# EAGLE board rj12_adapter (EAGLE 8.5.0)
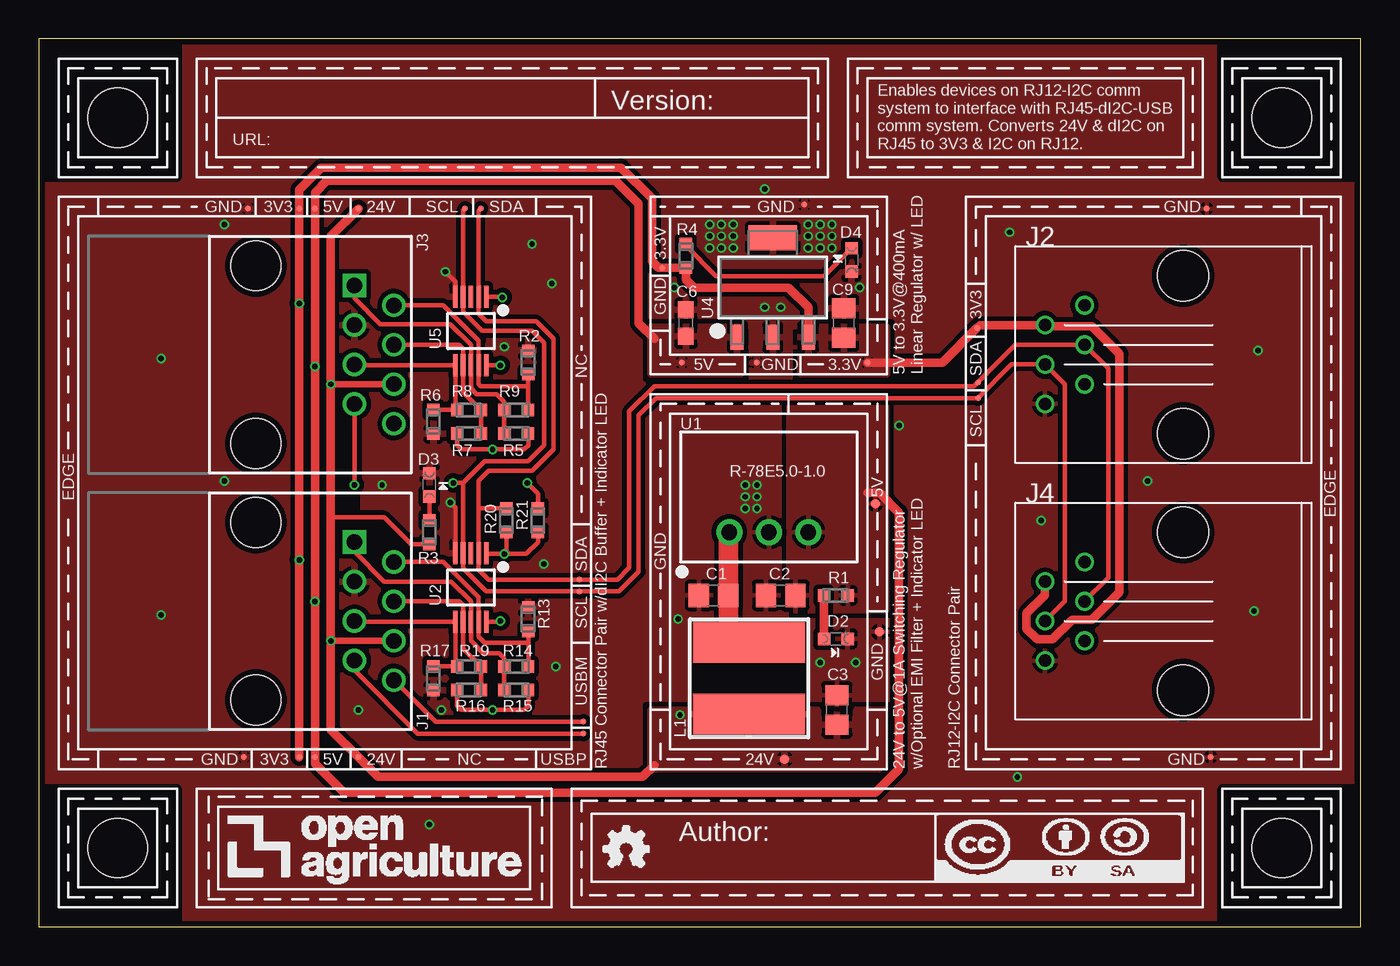
[diagram p0: board, top side]
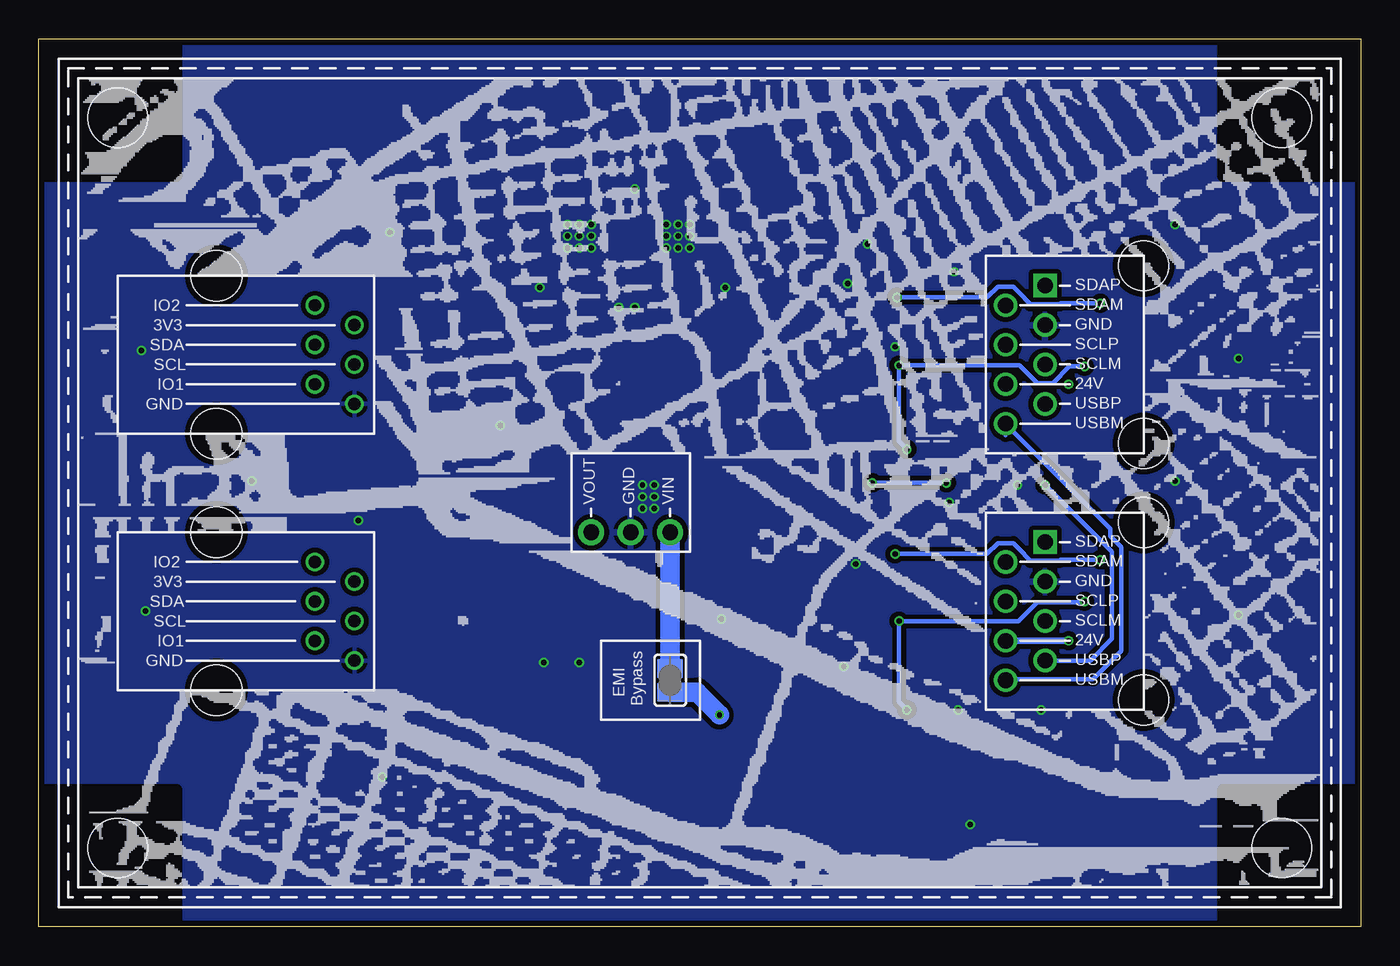
[diagram p1: board, bottom side, seen from below]

Size 85.09 x 57.15 mm. Coordinates in mm from the lower left corner, seen from the top.
Outline: 0,0 85.09,0 85.09,57.15 0,57.15 0,0
Copper layers (1*16): Top 0.035559375mm / dielectric 1.6mm / Bottom 0.035559375mm
Design rules "oshpark-2layer-mask": minimum track width 6mil, minimum drill 10mil, track to track 6mil, track to pad 6mil, pad to pad 6mil, via to via 6mil, smd to smd 6mil, copper to edge 15mil, drill to drill 6mil, minimum pad ring 5mil, minimum via ring 5mil, stop-mask expansion 2.5mil, vias tented up to drill 20mil, thermal gap 10mil
tRestrict: 3 lines

## Footprints (pad centres in the part's own frame; a part is rotated, then mirrored left to right if it is on the bottom)
C0805 = smd 1.3 x 1.5: 1 -0.95,0; 2 0.95,0
C0603 = smd 1.1 x 1: 1 -0.85,0; 2 0.85,0
CHIPLED_0603 = smd 0.8 x 0.8: A 0,-0.75; C 0,0.75
RJ45-DI2C-USB-54602-908LF = drill 1: 24V(6) 1.905,8.89; DSCLM(5) 0.635,6.35; DSCLP(4) -0.635,8.89; DSDAM(2) -3.175,8.89; GND(3) -1.905,6.35; USBM(8) 4.445,8.89; USBP(7) 3.175,6.35 | drill 1 square: DSDAP(1) -4.445,6.35 | hole 3.2: -5.715,0; 5.715,0
RJ12-I2C-A-2004-1-4-LP-N-R = drill 0.8: 1 -8.89,-3.175; 2 -6.35,-1.905; 3 -8.89,-0.635; 4 -6.35,0.635; 5 -8.89,1.905; 6 -6.35,3.175 | hole 3.25: 0,-5.08; 0,5.08
29333C = smd 2.6 x 7.2: 1 -2.3,0; 2 2.3,0
RC0603N = smd 0.756 x 0.8: 1 -0.778,0; 2 0.778,0
SJ1 = smd 1.168 x 1.6: 1 -0.762,0; 2 0.762,0
TP04R = smd 0.4 x 0.4: 1 0,0
TP06R = smd 0.6 x 0.6: TP 0,0
R-78E5.0-1.0 = drill 1 pad 1.676: 1 -2.54,0; 2 0,0; 3 2.54,0
SOP50P490X110-10N = smd 1.4 x 0.3: 1 -2.2,1; 2 -2.2,0.5; 3 -2.2,0; 4 -2.2,-0.5; 5 -2.2,-1; 6 2.2,-1; 7 2.2,-0.5; 8 2.2,0; 9 2.2,0.5; 10 2.2,1
MP04A = smd 1.6 x 0.838: 1 -3.2,2.3; 2 -3.2,0; 3 -3.2,-2.3 | smd 1.6 x 3.099: 4 3.2,0
CORNER = hole 3.81: 0,0

## Placement (x,y rotation side)
C1  10uF  [C0805]  43.43,21.34 180 top
C2  10uF  [C0805]  47.75,21.34 180 top
C3  10uF  [C0805]  51.37,13.97 90 top
C6  0.1uF  [C0603]  41.66,38.86 90 top
C9  10uF  [C0805]  51.82,38.86 90 top
D2  APT1608  [CHIPLED_0603]  51.31,18.54 270 top
D3  APT1608  [CHIPLED_0603]  25.15,28.45 0 top
D4  APT1608  [CHIPLED_0603]  52.32,42.93 180 top
J1  54602-908LF  [RJ45-DI2C-USB-54602-908LF]  13.97,20.32 270 top
J2  A-2004-1-4-LP-N-R  [RJ12-I2C-A-2004-1-4-LP-N-R]  73.66,36.83 0 top
J3  54602-908LF  [RJ45-DI2C-USB-54602-908LF]  13.97,36.83 270 top
J4  A-2004-1-4-LP-N-R  [RJ12-I2C-A-2004-1-4-LP-N-R]  73.66,20.32 0 top
L1  33uH  [29333C]  45.72,16 90 top
R1  100  [RC0603N]  51.31,21.34 0 top
R2  600  [RC0603N]  31.5,36.32 90 top
R3  1K  [RC0603N]  25.15,25.4 270 top
R4  100  [RC0603N]  41.66,43.18 270 top
R5  600  [RC0603N]  30.73,31.75 180 top
R6  600  [RC0603N]  25.4,32.51 90 top
R7  600  [RC0603N]  27.69,31.75 180 top
R8  120  [RC0603N]  27.69,33.27 0 top
R9  120  [RC0603N]  30.73,33.27 0 top
R13  600  [RC0603N]  31.5,19.81 90 top
R14  120  [RC0603N]  30.73,16.76 0 top
R15  600  [RC0603N]  30.73,15.24 180 top
R16  600  [RC0603N]  27.69,15.24 180 top
R17  600  [RC0603N]  25.4,16 90 top
R19  120  [RC0603N]  27.69,16.76 0 top
R20  10K  [RC0603N]  30.1,26.16 270 top
R21  10K  [RC0603N]  32.13,26.16 270 top
SJ1  [SJ1]  44.45,15.88 90 bottom
TP1  TPTP04R  [TP04R]  40.13,42.42 0 top
TP2  TPTP04R  [TP04R]  41.4,36.32 0 top
TP3  TPTP06R  [TP06R]  48.01,10.79 0 top
TP4  TPTP04R  [TP04R]  49.28,46.48 0 top
TP5  TPTP04R  [TP04R]  16.76,10.92 0 top
TP6  TPTP04R  [TP04R]  53.34,36.32 0 top
TP7  TPTP04R  [TP04R]  60.39,38.54 0 top
TP8  TPTP04R  [TP04R]  34.8,22.35 0 top
TP9  TPTP04R  [TP04R]  34.8,21.59 0 top
TP10  TPTP04R  [TP04R]  46.23,36.32 0 top
TP11  TPTP04R  [TP04R]  75.18,46.23 0 top
TP15  TPTP04R  [TP04R]  60.45,34.04 0 top
TP16  TPTP04R  [TP04R]  17.78,10.92 0 top
TP17  TPTP04R  [TP04R]  13.21,10.92 0 top
TP18  TPTP04R  [TP04R]  35.05,12.45 0 top
TP19  TPTP04R  [TP04R]  20.57,10.92 0 top
TP20  TPTP04R  [TP04R]  35.05,13.21 0 top
TP21  TPTP04R  [TP04R]  16.76,46.23 0 top
TP22  TPTP04R  [TP04R]  17.78,46.23 0 top
TP23  TPTP04R  [TP04R]  20.57,46.23 0 top
TP24  TPTP04R  [TP04R]  13.46,46.23 0 top
TP25  TPTP04R  [TP04R]  27.43,46.23 0 top
TP26  TPTP04R  [TP04R]  28.45,46.23 0 top
TP27  TPTP06R  [TP06R]  53.85,27.24 0 top
TP28  TPTP06R  [TP06R]  54.1,18.99 0 top
TP29  TPTP04R  [TP04R]  75.44,10.92 0 top
TP30  TPTP04R  [TP04R]  60.45,35.05 0 top
U1  R-78E5.0-1.0  [R-78E5.0-1.0]  46.99,25.4 0 top
U2  PCA9615  [SOP50P490X110-10N]  27.81,21.84 270 top
U4  LM2937-3.3V  [MP04A]  47.24,41.15 90 top
U5  PCA9615  [SOP50P490X110-10N]  27.81,38.35 270 top
U$1  [CORNER]  5.08,5.08 0 top
U$2  [CORNER]  5.08,52.07 270 top
U$3  [CORNER]  80.01,52.07 180 top
U$4  [CORNER]  80.01,5.08 90 top
U$5  [LOGO]  10.16,1.27 0 top
U$6  AUTHOR  [AUTHOR]  34.29,1.27 0 top
U$7  TITLE  [TITLE]  10.16,48.26 0 top
U$9  [CAMBRIDGE-MAP-RJ12-ADAPTER-V-1-1]  1.27,1.27 0 top

## Library data of the parts
C1-C3 C9 = openag-capacitors; MANUFACTURER: Taiyo Yuden; MPN: GMK212BBJ106KG-T; VENDOR: Digikey; VLINK: https://www.digikey.com/product-detail/en/taiyo-yuden/GMK212BBJ106KG-T/587-4893-1-ND/6563736; VPN: 587-4893-1-ND
C6 = openag-capacitors; MANUFACTURER: Kemet; MPN: C0603C104K5RACTU; VENDOR: Digikey; VLINK: https://www.digikey.com/product-detail/en/kemet/C0603C104K5RACTU/399-5089-1-ND/1465623; VPN: 399-5089-1-ND
D2-D4 = openag-diodes; MANUFACTURER: Kingbright; MPN: APT1608CGCK; VENDOR: Digikey; VLINK: https://www.digikey.com/product-detail/en/kingbright/APT1608CGCK/754-1116-1-ND/1747833#; VPN: 754-1116-1-ND
J1 J3 = openag-connectors; MANUFACTURER: Amphenol FCI; MPN: 54602-908LF; VENDOR: Digikey; VLINK: https://www.digikey.com/product-detail/en/amphenol-fci/54602-908LF/609-1046-ND/1001360; VPN: 609-1046-ND
J2 J4 = openag-connectors; MANUFACTURER: Assmann WSW Components; MPN: A-2004-1-4-LP-N-R; VENDOR: Digikey; VLINK: https://www.digikey.com/product-detail/en/assmann-wsw-components/A-2004-1-4-LP-N-R/AE10383-ND/2183634; VPN: AE10383-ND
L1 = openag-inductors; MANUFACTURER: Murata Power Solutions Inc.; MPN: 29333C; VENDOR: Digikey; VLINK: https://www.digikey.com/product-detail/en/murata-power-solutions-inc/29333C/811-1138-1-ND/1924860; VPN: 811-1138-1-ND
R1 R4 = openag-resistors; MANUFACTURER: Yageo; MPN: RC0603JR-07100RL; VENDOR: Digikey; VLINK: https://www.digikey.com/product-detail/en/yageo/RC0603JR-07100RL/311-100GRCT-ND/729644; VPN: 311-100GRCT-ND
R2 R5-R7 R13 R15-R17 = openag-resistors; MANUFACTURER: Yageo; MPN: RC0603FR-07604RL; VENDOR: Digikey; VLINK: https://www.digikey.com/product-detail/en/yageo/RC0603FR-07604RL/311-604HRCT-ND/730276; VPN: 311-604HRCT-ND
R3 = openag-resistors; MANUFACTURER: Panasonic; MPN: P20283CT-ND; VENDOR: Digikey; VLINK: https://www.digikey.com/product-detail/en/panasonic-electronic-components/ERJ-PB3D1001V/P20283CT-ND/6214538; VPN: P20283CT-ND
R8 R9 R14 R19 = openag-resistors; MANUFACTURER: Yageo; MPN: RC0603FR-07120RL; VENDOR: Digikey; VLINK: https://www.digikey.com/product-detail/en/yageo/RC0603FR-07120RL/311-120HRCT-ND/729867; VPN: 311-120HRCT-ND
R20 R21 = openag-resistors; MANUFACTURER: Panasonic; MPN: ERJ-3EKF1002V; VENDOR: Digikey; VLINK: https://www.digikey.com/product-detail/en/panasonic-electronic-components/ERJ-3EKF1002V/P10.0KHCT-ND/198102; VPN: P10.0KHCT-ND
SJ1 = openag-connectors; MPN: N/A
TP1-TP11 TP15-TP30 = openag-testpads; MPN: N/A
U1 = openag-regulators; MANUFACTURER: Recom Power; MPN: R-78E5.0-1.0; VENDOR: Digikey; VLINK: https://www.digikey.com/product-detail/en/recom-power/R-78E5.0-1.0/945-2201-ND/4930585; VPN: 945-2201-ND
U2 U5 = openag-buffers; MANUFACTURER: NXP USA Inc.; MPN: PCA9615DPJ; VENDOR: Digikey; VLINK: https://www.digikey.com/product-detail/en/nxp-usa-inc/PCA9615DPJ/568-11484-1-ND/4864508; VPN: 568-11484-1-ND
U4 = openag-regulators; MANUFACTURER: Texas Instruments; MPN: LM2937IMP-3.3/NOPB; VENDOR: Digikey; VLINK: https://www.digikey.com/product-detail/en/texas-instruments/LM2937IMP-3.3-NOPB/LM2937IMP-3.3-NOPBCT-ND/270742#; VPN: LM2937IMP-3.3/NOPBCT-ND
U$1-U$5 U$9 = openag-frames
U$6 = openag-frames; AUTHOR: Jake Rye; MPN: N/A
U$7 = openag-frames; MPN: N/A; TITLE: RJ12 to RJ45 Adapter; URL: https://github.com/openaginitiative/openag_eagle/proj/rj12-adapter; VER: 1.1

## Nets
24V_EMI: C1.1 L1.2 SJ1.2 U1.1
+3V3: C9.1 J2.5 J4.5 R4.2 R20.2 R21.2 TP1.1 TP5.1 TP6.1 TP7.1 TP21.1 U2.1 U4.3 U5.1
+5V: C2.1 C6.1 R1.2 R5.1 R7.2 R15.1 R16.2 TP2.1 TP16.1 TP22.1 TP27.TP U1.3 U2.10 U4.1 U5.10
+24V: C3.1 J1.24V(6) J3.24V(6) L1.1 R3.2 SJ1.1 TP3.TP TP19.1 TP23.1
DSCLM_1: J1.DSCLM(5) R17.2 R19.1 U2.6
DSCLM_2: J3.DSCLM(5) R6.2 R8.1 U5.6
DSCLP_1: J1.DSCLP(4) R16.1 R19.2 U2.7
DSCLP_2: J3.DSCLP(4) R7.1 R8.2 U5.7
DSDAM_1: J1.DSDAM(2) R13.1 R14.2 U2.9
DSDAM_2: J3.DSDAM(2) R2.1 R9.2 U5.9
DSDAP_1: J1.DSDAP(1) R14.1 R15.2 U2.8
DSDAP_3: J3.DSDAP(1) R5.2 R9.1 U5.8
GND: C1.2 C2.2 C3.2 C6.2 C9.2 D2.C D3.C D4.C J1.GND(3) J2.1 J3.GND(3) J4.1 R2.2 R6.1 R13.2 R17.1 TP4.1 TP10.1 TP11.1 TP17.1 TP24.1 TP28.TP TP29.1 U1.2 U2.5 U4.2 U4.4 U5.5
N$5: D4.A R4.1
N$6: D2.A R1.1
N$7: D3.A R3.1
SCL: J2.3 J4.3 R21.1 TP9.1 TP15.1 TP25.1 U2.4 U5.4
SDA: J2.4 J4.4 R20.1 TP8.1 TP26.1 TP30.1 U2.2 U5.2
USBM: J1.USBM(8) J3.USBM(8) TP20.1
USBP: J1.USBP(7) J3.USBP(7) TP18.1

## Tracks (layer width: path | path; a pad name or v marks a point on that pad's centre or on a via)
24V_EMI
  Top 1.27: U1.1 44.38,25.33 C1.1 44.38,19.64 arc90 L1.2
  Bottom 1.27: U1.1 SJ1.2
+3V3  (via drill 0.35)
  Top 0.305: U2.1 28.85,24 v29.97,24 | v29.97,24 30.1,24.13 R20.2 | U5.1 29.8,40.55 v29.84,40.51 | v29.97,24 31.37,24 32.13,24.77 R21.2
  Top 0.559: TP5.1 v16.76,23.62 v16.76,40.13 TP21.1 16.76,47.45 18.18,48.87 37.49,48.87 39.47,46.89 39.47,42.82 39.88,42.42 TP1.1 41.64,42.42 R4.2 41.66,41.66 42.16,41.15 48.26,41.15 49.54,39.86 U4.3 | TP6.1 58.17,36.32 TP7.1 60.58,38.73 J2.5 64.86,38.65 67.8,38.65 69.57,36.88 69.57,21.54 67.8,19.77 66.53,19.77 65.26,18.5 64.28,18.5 63.59,19.19 63.59,20.18 64.77,21.36 J4.5
  Bottom 0.305: v29.97,24 24.06,24 23.36,24.7 22.36,24.7 21.65,24 21.65,23.95 21.26,23.56 19.38,23.56 19.32,23.62 v16.76,23.62 | v16.76,40.13 19.32,40.13 19.38,40.07 21.26,40.07 21.65,40.46 21.65,40.51 22.36,41.21 23.36,41.21 24.06,40.51 v29.84,40.51
  pour Top (isolate 0.305): 54.61,35.56 54.61,38.61 49.02,38.61 49.02,35.56
+5V  (via drill 0.35)
  Top 0.305: U5.10 29.71,36.15 v29.72,36.14 | R7.2 26.91,31 27.18,30.73 v29.21,30.73 31.24,30.73 31.51,31 R5.1 | U2.10 29.68,19.64 v29.72,19.68 | R16.2 26.91,14.24 27.18,13.97 v29.21,13.97 31.24,13.97 31.51,14.24 R15.1
  Top 0.559: 39.62,37.85 38.61,38.86 38.61,46.53 37.13,48.01 18.54,48.01 17.78,47.24 TP22.1 v17.78,36.07 v17.78,20.95 TP16.1 | TP16.1 17.78,10.67 | TP16.1 17.78,10.5 19.64,8.64 53.85,8.64 55.37,10.16 55.37,26.67 54.1,27.94 53.34,27.94
  Bottom 0.305: v29.21,30.73 29.72,31.24 v29.72,36.14 21.98,36.14 20.82,34.99 19.82,34.99 18.74,36.07 v17.78,36.07 | v17.78,20.95 17.84,20.89 20.82,20.89 22.03,19.68 v29.72,19.68 29.72,14.48 v29.21,13.97
  pour Top (isolate 0.305): 54.61,34.29 54.61,20.32 48.26,20.32 48.26,34.29
  pour Top (isolate 0.305): 39.37,35.56 45.21,35.56 45.21,38.61 39.37,38.61
+24V  (via drill 0.35)
  Top 0.305: 18.92,18.41 18.8,18.29 | 18.8,26.35 22.23,26.35 23.95,24.62 R3.2
  Top 0.406: J1.24V(6) 18.92,18.41 | J3.24V(6) v18.8,34.92
  Top 0.559: 39.62,10.41 38.86,9.65 21.84,9.65 TP19.1 18.8,12.7 v18.8,18.41 | 18.8,18.29 v18.8,18.41 | v18.8,18.41 18.8,26.35 v18.8,34.92 18.8,44.45 TP23.1
  Bottom 0.406: J1.24V(6) v18.8,18.41
  Bottom 1.27: SJ1.1 42.74,15.11 v41.27,13.65
  pour Top (isolate 0.406): 54.61,13.97 54.61,10.16 39.37,10.16 39.37,13.97
DSCLM_1
  Top 0.305: R17.2 25.42,16.76 R19.1 26.81,16.8 U2.6 20.36,19.64 J1.DSCLM(5)
DSCLM_2
  Top 0.305: U5.6 26.81,36.69 | U5.6 20.32,36.15 J3.DSCLM(5) | U5.6 26.81,33.37 R8.1 25.42,33.27 R6.2
DSCLP_1
  Top 0.305: J1.DSCLP(4) 27.05,20.95 27.31,20.69 U2.7 27.31,17.91 R19.2 R16.1
DSCLP_2
  Top 0.305: J3.DSCLP(4) 27.05,37.47 27.31,37.2 U5.7 27.31,34.41 28.45,33.27 R8.2 R7.1
DSDAM_1
  Top 0.305: U2.9 28.32,19.65 | U2.9 28.31,21.22 26.04,23.5 J1.DSDAM(2) | R14.2 31.51,18.29 | 31.51,18.29 31.51,18.76 R13.1 | U2.9 28.31,18.68 28.7,18.29 31.51,18.29
DSDAM_2
  Top 0.305: J3.DSDAM(2) 26.04,40.01 28.31,37.73 U5.9 28.31,34.93 28.45,34.8 31.5,34.8 | R2.1 31.5,34.8 | 31.5,34.8 31.5,33.29 R9.2
DSDAP_1
  Top 0.305: J1.DSDAP(1) 20.32,24.13 22.23,22.23 26.54,22.23 27.81,20.95 U2.8 27.81,18.41 28.61,17.62 29.62,17.62 29.96,17.29 R14.1 | R14.1 R15.2 | 29.89,16.76 R14.1
DSDAP_3
  Top 0.305: J3.DSDAP(1) 20.32,40.44 21.96,38.8 26.48,38.8 27.81,37.47 U5.8 27.81,34.67 28.19,34.29 29.46,34.29 29.96,33.8 R9.1 R5.2
GND  (via drill 0.35)
  Top 0.305: U5.5 26.81,41.51 v26.16,42.16 | v26.48,27.3 26.81,26.97 U2.5
  other vias: 46.74,47.5 62.99,9.65 25.15,6.6 7.87,20.07 62.48,44.7 64.52,26.16 33.27,16.76 71.37,28.7 55.37,32.26 50.29,17.02 41.15,19.81 44.7,44.45 44.7,43.69 43.94,44.45 43.94,43.69 43.18,43.69 43.18,44.45 44.7,45.21 43.18,45.21 43.94,45.21 49.53,43.69 50.29,43.69 51.05,43.69 49.53,44.45 49.53,45.21 50.29,44.45 50.29,45.21 51.05,45.21 51.05,44.45 46.74,39.88 52.83,41.15 47.75,39.88 11.94,28.7 40.89,41.15 78.23,20.32 78.49,37.08 7.87,36.58 22.1,28.45 11.94,45.21 29.97,37.34 25.91,13.97 46.23,26.92 46.23,27.69 45.47,27.69 45.47,26.92 46.23,28.45 45.47,28.45 31.75,43.94 33.02,41.4 32.51,23.37 20.57,13.97 52.58,17.02
  pour Top (isolate 0.406, rank 3): 39.37,46.99 39.37,35.56 54.61,35.56 54.61,46.99
  pour Top (isolate 0.305, rank 3): 0,0 85.09,0 85.09,57.15 0,57.15
  pour Top (isolate 0.305): 1.27,10.16 35.56,10.16 35.56,46.99 1.27,46.99
  pour Bottom (isolate 0.406): 35.56,10.16 35.56,46.99 1.27,46.99 1.27,10.16
  pour Bottom (isolate 0.305, rank 3): 0,0 85.09,0 85.09,57.15 0,57.15
  pour Top (isolate 0.305): 83.82,46.99 83.82,10.16 59.69,10.16 59.69,46.99
  pour Top (isolate 0.305, rank 2): 54.61,34.29 54.61,10.16 39.37,10.16 39.37,34.29
  pour Bottom (isolate 0.406, rank 2): 39.37,34.29 39.37,10.16 54.61,10.16 54.61,34.29
  pour Bottom (isolate 0.406): 39.37,46.99 54.61,46.99 54.61,35.56 39.37,35.56
N$5
  Top 0.305: D4.A 50.53,41.88 43.6,41.88 41.66,43.83 R4.1
N$6
  Top 0.559: R1.1 50.53,18.57 D2.A
N$7
  Top 0.305: R3.1 D3.A
SCL  (via drill 0.35)
  Top 0.305: 27.31,28.58 U2.4 27.31,23.08 28.8,21.59 TP9.1 37.34,21.59 38.61,22.86 38.61,32.92 39.73,34.04 TP15.1 62.61,36.2 J2.3 66.04,34.92 66.04,20.95 J4.3 | 31.75,30.23 31.5,29.97 28.7,29.97 27.31,28.58 | TP25.1 27.31,46.11 U5.4 27.31,39.59 28.55,38.35 31.75,38.35 32.51,37.59 32.51,30.99 31.75,30.23 | 27.31,28.58 26.68,28.58 v26.67,28.57 | v31.43,28.57 32.13,27.88 R21.1 | 31.75,30.23
  Bottom 0.305: v26.67,28.57 v31.43,28.57
SDA
  Top 0.305: 28.31,26.92 U2.2 28.31,23 28.96,22.35 TP8.1 37.24,22.35 38,23.11 38,33.17 39.62,34.8 60.2,34.8 TP30.1 62.87,37.47 J2.4 68.83,35.94 68.83,22.48 J4.4 | R20.1 28.33,26.94 28.31,26.92 | 28.31,26.92 28.31,28.72 28.96,29.36 31.75,29.36 33.12,30.73 33.12,37.84 32,38.96 28.8,38.96 28.31,39.45 U5.2 28.31,46.09 TP26.1
USBM
  Top 0.305: J1.USBM(8) 25.53,13.21 TP20.1
  Bottom 0.305: 22.86,31.65 J3.USBM(8) 16.1,25.63 16.1,25.15 15.39,24.44 15.39,17.78 17.24,15.94 22.8,15.94 J1.USBM(8)
USBP  (via drill 0.35)
  Top 0.305: J1.USBP(7) 20.32,16.51 24.38,12.45 TP18.1 | J3.USBP(7) v20.32,28.45
  Bottom 0.305: v20.32,28.45 16,24.13 16,18.54 17.4,17.14 J1.USBP(7)

## Text on the board
tPlace: Enables devices on RJ12-I2C comm / system to interface with RJ45-dI2C-USB / comm system. Converts 24V & dI2C on / RJ45 to 3V3 & I2C on RJ12. | GND | 3V3 | 5V | 24V | SCL | SDA | GND | GND | 3.3V | GND | 3V3 | 5V | GND | 3.3V | 5V to 3.3V@400mA / Linear Regulator w/ LED | NC | SDA | SCL | 5V | EDGE | EDGE | GND | SDA | SCL | GND | USBM | GND | 3V3 | 5V | 24V | NC | USBP | RJ45 Connector Pair w/dI2C Buffer + Indicator LED | 24V | 24V to 5V@1A Switching Regulator / w/Optional EMI Filter + Indicator LED | RJ12-I2C Connector Pair | GND
bPlace: EMI / Bypass